# Altium PCB BreakBoard.PcbDoc
Units mm, origin at the board's own origin, x right, y up, seen from the top; angles counter-clockwise.
Board outline 137.03 x 88.14 mm, 2 copper layers (Top Layer, Bottom Layer), stack 1.331 mm thick; 41 components, 30 nets, 130 pads, 0 vias.
Unrouted connection lines stored in the file: 63.
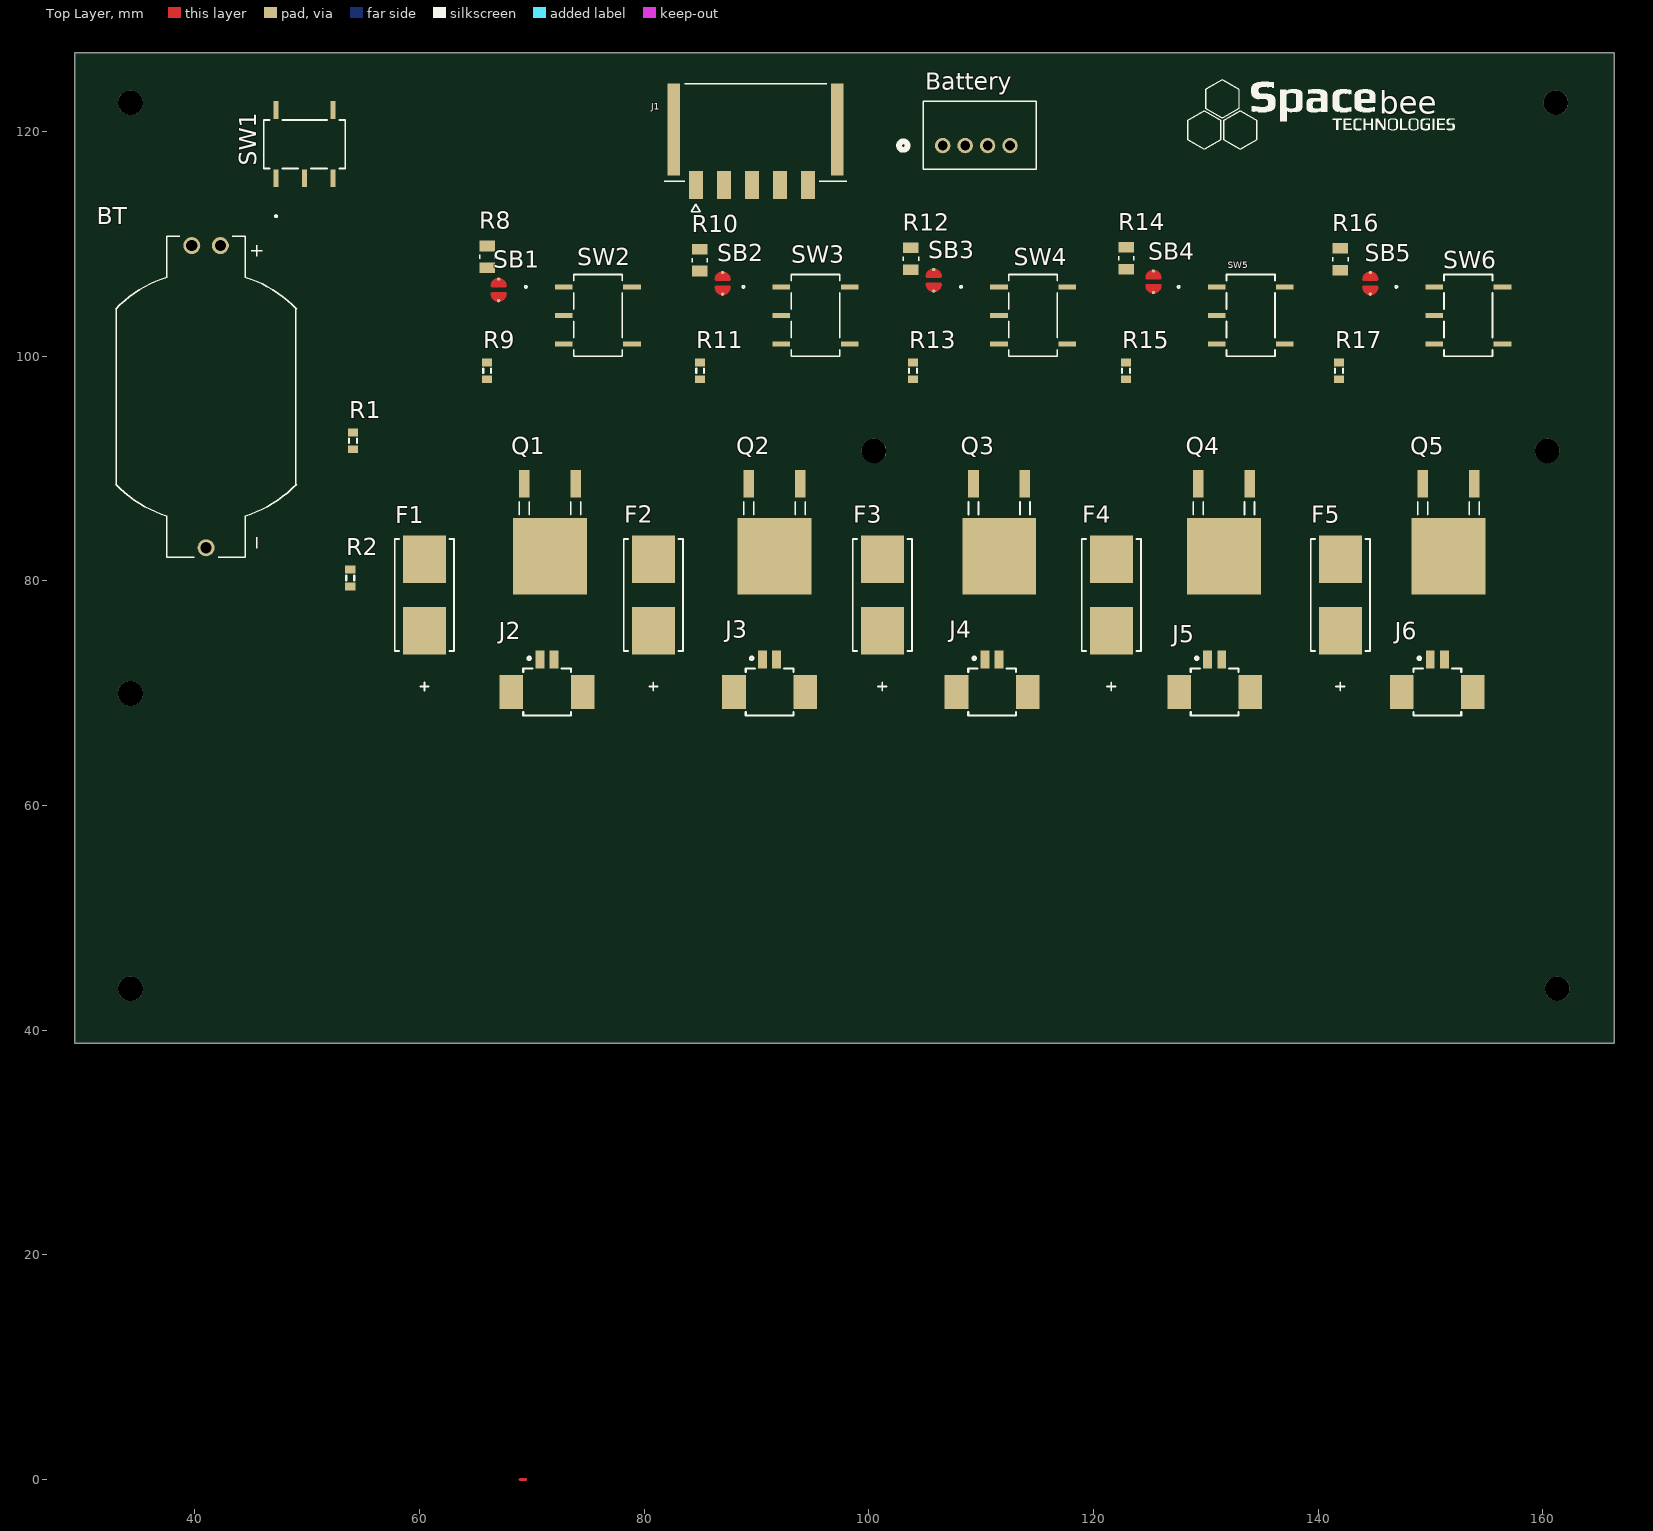
[diagram p0: Top Layer view]
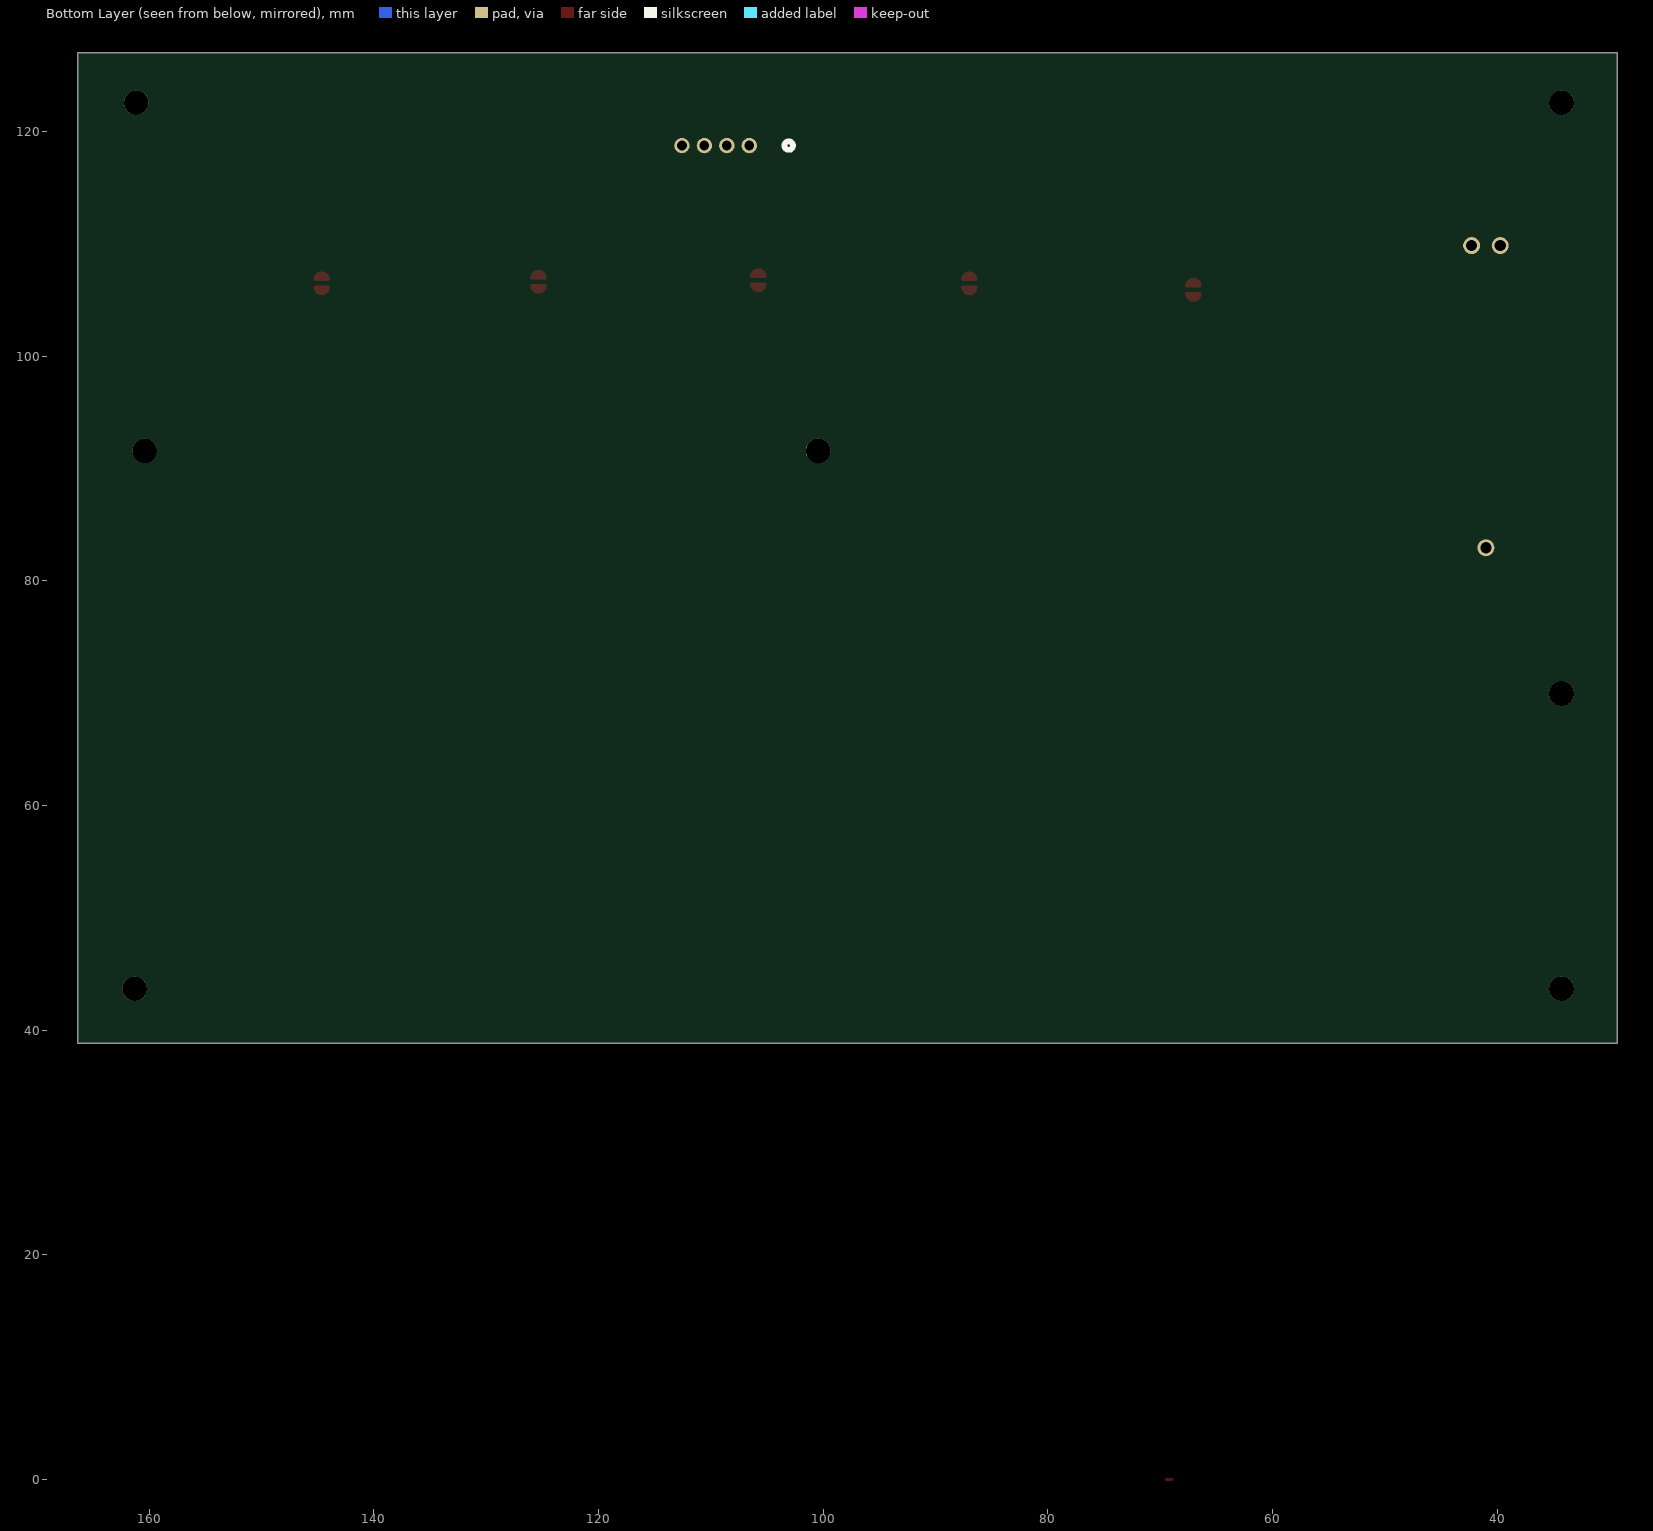
[diagram p1: Bottom Layer view, seen from below]

## Layer stack, top to bottom
Top Solder: solder mask 0.0102, Solder Resist, Dk 3.5
Top Layer: signal copper 0.0356
Dielectric 1: dielectric 1.26, FR-4, Dk 4.8
Bottom Layer: signal copper 0.0356
Bottom Solder: solder mask 0.0102, Solder Resist, Dk 3.5

## Board outline
29.337,38.862 166.37,38.862 166.37,127 29.337,127

## Design rules (kind name [scope] priority, off if disabled: settings)
Clearance Clearance_1 [All] p1: gap=0.4 ignorepadtopadclearanceinfootprint=FALSE
Clearance "Schematic Clearance Constraint" [InNet('GND')] p2: gap=0.015 ignorepadtopadclearanceinfootprint=FALSE
Clearance Vias [OnLayer('Top Layer')] p3: gap=0.8 ignorepadtopadclearanceinfootprint=FALSE
PolygonConnect [All] p1: connectstyle=Relief reliefconductorwidth=0.254 reliefentries=4 polygonreliefangle="90 Angle" airgapwidth=0.254
RoutingVias [All] p1: holewidth=0.711 width=1.27 viastyle="Through Hole" minholewidth=0.711 minwidth=1.27 maxholewidth=0.711 maxwidth=1.27
SolderMaskExpansion [All] p1: expansion=0.102
Width "Schematic Width Constraint_11" [InNet('NetJ3_2')] p1: maxlimit=1.473 minlimit=1.473 preferedwidth=1.473 minimp=50.000000 maximp=50.000000 favimp=50.000000
Width "Schematic Width Constraint_10" [InNet('GND')] p2: maxlimit=1.473 minlimit=1.473 preferedwidth=1.473 minimp=50.000000 maximp=50.000000 favimp=50.000000
Width "Schematic Width Constraint_9" [InNet('NetJ5_2')] p3: maxlimit=1.473 minlimit=1.473 preferedwidth=1.473 minimp=50.000000 maximp=50.000000 favimp=50.000000
Width "Schematic Width Constraint_8" [InNet('NetJ4_2')] p4: maxlimit=1.473 minlimit=1.473 preferedwidth=1.473 minimp=50.000000 maximp=50.000000 favimp=50.000000
Width "Schematic Width Constraint_7" [InNet('NetJ6_2')] p5: maxlimit=1.473 minlimit=1.473 preferedwidth=1.473 minimp=50.000000 maximp=50.000000 favimp=50.000000
Width "Schematic Width Constraint_1" [InNet('NetJ2_2')] p6: maxlimit=1.473 minlimit=1.473 preferedwidth=1.473 minimp=50.000000 maximp=50.000000 favimp=50.000000
Width "Schematic Width Constraint" [InNetClass('Ids')] p7: maxlimit=1.473 minlimit=1.473 preferedwidth=1.473 minimp=50.000000 maximp=50.000000 favimp=50.000000
Width [All] p8: maxlimit=0.254 minlimit=0.254 preferedwidth=0.254
30 further rules are at their usual default settings.

## Classes and differential pairs
net class Ids: NetBattery_4
net class Undefined: GND NetJ2_2 NetJ3_2 NetJ4_2 NetJ5_2 NetJ6_2 NetR1_1

## Components (designator, comment, footprint, x,y, rotation, side; value= is the part's Value field where it differs from the comment)
Battery "Header 4" 292132-4_TYC 106.585,118.745 r0 top
BT "BU2032-1" BAT_BU2032-1 41.021,96.393 r270 top
F1 "015403.5DRT" 0154Series_LTF 60.452,78.74 r90 top
F2 "015403.5DRT" 0154Series_LTF 80.835,78.74 r90 top
F3 "015403.5DRT" 0154Series_LTF 101.219,78.74 r90 top
F4 "015403.5DRT" 0154Series_LTF 121.603,78.74 r90 top
F5 "015403.5DRT" 0154Series_LTF 141.986,78.74 r90 top
J1 "Micro" MOLEX_1054302105 89.916,120.015 r180 top
J2 "DC/DC" MOLEX_53261-0271 71.374,70.104 r0 top
J3 "DC/DC" MOLEX_53261-0271 91.183,70.104 r0 top
J4 "DC/DC" MOLEX_53261-0271 110.993,70.104 r0 top
J5 "DC/DC" MOLEX_53261-0271 130.802,70.104 r0 top
J6 "DC/DC" MOLEX_53261-0271 150.612,70.104 r0 top
Q1 "IRL530" IRL530NSTRLPBF_INF 71.628,82.169 r180 top
Q2 "IRL530" IRL530NSTRLPBF_INF 91.623,82.169 r180 top
Q3 "IRL530" IRL530NSTRLPBF_INF 111.619,82.169 r180 top
Q4 "IRL530" IRL530NSTRLPBF_INF 131.614,82.169 r180 top
Q5 "IRL530" IRL530NSTRLPBF_INF 151.61,82.169 r180 top
R1 "Res3" J1-0603 54.102,92.468 r90 top value=1M
R2 "Res3" J1-0603 53.848,80.252 r90 top value=3.3M
R8 "Res3" RESC2012X60N 66.04,108.839 r90 top value=2.8M
R9 "Res3" J1-0603 66.04,98.691 r90 top value=3.3M
R10 "Res3" RESC2012X60N 84.963,108.547 r90 top value=2.8M
R11 "Res3" J1-0603 84.995,98.691 r90 top value=3.3M
R12 "Res3" RESC2012X60N 103.759,108.674 r90 top value=2.8M
R13 "Res3" J1-0603 103.949,98.691 r90 top value=3.3M
R14 "Res3" RESC2012X60N 122.936,108.712 r90 top value=2.8M
R15 "Res3" J1-0603 122.904,98.691 r90 top value=3.3M
R16 "Res3" RESC2012X60N 141.986,108.623 r90 top value=2.8M
R17 "Res3" J1-0603 141.859,98.691 r90 top value=3.3M
SB1 "SolderBridge" PCBComponent_1#1 62.936,114.473 r270 top
SB2 "SolderBridge" PCBComponent_1#2 82.875,115.052 r270 top
SB3 "SolderBridge" PCBComponent_1#3 101.671,115.321 r270 top
SB4 "SolderBridge" PCBComponent_1#4 121.229,115.194 r270 top
SB5 "SolderBridge" PCBComponent_1#5 140.533,115.052 r270 top
SW1 "GT12MSCBE" SW5_GT12MSCBE_CNK 49.784,118.872 r90 top
SW2 "GT12MSCBE" SW5_GT12MSCBE_CNK 75.895,103.632 r0 top
SW3 "GT12MSCBE" SW5_GT12MSCBE_CNK 95.266,103.632 r0 top
SW4 "GT12MSCBE" SW5_GT12MSCBE_CNK 114.636,103.632 r0 top
SW5 "GT12MSCBE" SW5_GT12MSCBE_CNK 134.007,103.632 r0 top
SW6 "GT12MSCBE" SW5_GT12MSCBE_CNK 153.378,103.632 r0 top

## Footprints (in the part's own frame and the unit in brackets; to place one, negate y for a bottom-side part, rotate by r counter-clockwise, add the part's x,y. Pads: shape width x height; smd on the part's side, far side on the other; paste and mask are expansions set on the pad)
0154Series_LTF [mil]
  rect 167x150 smd paste+0 mask+0: 1(-125.5,0) 2(125.5,0)
  silkscreen extent -336,-104 196,104, body extent -191,-99 191,99, height 152
292132-4_TYC [mil]
  round 54 hole 34 mask+0: 1(0,0) 2(78.74,0) 3(157.48,0) 4(236.22,0)
  silkscreen extent -153,-83 328,155, body extent -65,-85 321,143, height 268
BAT_BU2032-1 [mm]
  round 1.508 hole 1: NEG(13.45,0) S1+(-13.45,1.27) S2+(-13.45,-1.27)
  silkscreen extent -14.3,-8.06 14.3,8.06, body extent -14.43,-10 14.17,10, height 5.3
IRL530NSTRLPBF_INF [mil]
  rect 37x98 smd paste+0 mask+0: 1(-90.16,-254.84) 3(90.16,-254.84)
  rect 259x268 smd paste+0 mask+0: 2(0,0)
  silkscreen extent -108,-192 108,-147, body extent -129,-196 129,120, height 94
J1-0603 [mm] "Chip Resistor, Body 1.6x0.8mm, IPC High Density"
  rect 0.7x0.9 smd: 1(-0.75,0) 2(0.75,0)
  silkscreen extent -0.2,-0.35 0.2,0.35, body extent -0.85,-0.48 0.85,0.48, height 0.9
MOLEX_53261-0271 [mm]
  rect 0.8x1.6 smd: 1(-0.625,2.9) 2(0.625,2.9)
  rect 2.1x3 smd: P1(-3.175,0) P2(3.175,0)
  silkscreen extent -2.13,-2.1 2.13,3.14, body extent -3.82,-2.12 3.83,3.08, height 3.23
MOLEX_1054302105 [mm]
  rect 1.24x2.5 smd mask+0: 1(5.3,4.775) 2(2.8,4.775) 3(0.3,4.775) 4(-2.2,4.775) 5(-4.7,4.775)
  rect 1.1x8.2 smd mask+0: S1(-7.27,-0.155) S2(7.27,-0.155)
  silkscreen extent -8.12,-4.26 8.12,7.17, body extent -8.12,-5.8 8.12,5.63, height 6.99
PCBComponent_1#1 [mm]
  round 0.3 smd: 0(9.53,4.12) 1(7.61,4.12)
  Top Layer lines w0.254: 8.96,4.39 9.23,4.39 ; 8.9,3.52 ccw(c8.9,4.12) 9.5,4.12 ccw(c8.9,4.12) 8.9,4.72 ; 8.9,3.52 8.9,3.52 ; 8.9,3.52 8.9,3.52 ; 8.9,3.52 8.9,3.89 ; 8.9,3.52 8.9,3.52 ; 8.9,3.89 9.1,3.69 9.32,3.91 ; 8.9,3.89 8.9,4.33 ; 8.9,3.89 8.9,4.33 ; 9.32,3.91 9.32,4.12 9.32,4.32 9.23,4.23 9.23,4.39 ; 9.32,3.91 8.92,3.91 9.02,4.01 9.02,4.18 9.035,4.195 ; 9.32,3.91 9.11,4.12 9.035,4.195 ; 9.035,4.195 8.9,4.33 ; 9.035,4.195 9.23,4.39 ; 8.9,4.33 8.9,4.72 ; 8.9,4.33 8.9,4.72 ; 8.9,4.33 8.9,4.72 ; 9.23,4.39 8.9,4.72 ; 8.9,4.72 8.9,4.72 ; 8.9,4.72 8.9,4.72 ; 8.9,4.72 8.9,4.72 ; 8.9,4.72 8.9,4.72 ; 8.23,3.52 cw(c8.23,4.12) 8.23,4.72 8.23,3.52 ; 8.06,3.69 7.83,3.92 7.83,4.12 7.83,4.36 8.06,4.59 8.06,3.69
PCBComponent_1#2 [mm]
  round 0.3 smd: 0(9.53,4.12) 1(7.61,4.12)
  Top Layer lines w0.254: 8.96,4.39 9.23,4.39 ; 8.9,3.52 ccw(c8.9,4.12) 9.329,3.701 ccw(c8.9,4.12) 9.5,4.1 ccw(c8.9,4.12) 8.9,4.72 ; 8.9,3.52 8.9,3.89 ; 8.9,3.52 8.9,3.52 ; 8.9,3.52 8.9,3.52 ; 8.9,3.52 8.9,3.52 ; 8.9,3.89 9.089,3.701 9.1,3.69 9.111,3.701 9.32,3.91 ; 8.9,3.89 8.9,4.33 ; 8.9,3.89 8.9,4.33 ; 9.32,3.91 8.92,3.91 9.02,4.01 9.02,4.18 9.035,4.195 ; 9.32,3.91 9.13,4.1 9.035,4.195 ; 9.32,3.91 9.32,4.1 9.32,4.12 9.32,4.32 9.23,4.23 9.23,4.39 ; 9.035,4.195 8.9,4.33 ; 9.035,4.195 9.23,4.39 ; 8.9,4.33 8.9,4.72 ; 8.9,4.33 8.9,4.72 ; 8.9,4.33 8.9,4.72 ; 9.23,4.39 8.9,4.72 ; 8.9,4.72 8.9,4.72 ; 8.9,4.72 8.9,4.72 ; 8.9,4.72 8.9,4.72 ; 8.9,4.72 8.9,4.72 ; 8.23,3.52 cw(c8.23,4.12) 8.23,4.72 8.23,3.52 ; 8.06,3.69 7.83,3.92 7.83,4.12 7.83,4.36 8.06,4.59 8.06,3.69
PCBComponent_1#3 [mm]
  round 0.3 smd: 0(9.53,4.12) 1(7.61,4.12)
  Top Layer lines w0.254: 8.96,4.39 9.23,4.39 ; 8.9,3.89 8.9,3.52 ccw(c8.9,4.12) 9.5,4.12 ccw(c8.9,4.12) 8.9,4.72 ; 8.9,3.89 9.1,3.69 9.32,3.91 ; 8.9,3.89 8.9,4.33 ; 8.9,3.89 8.9,4.33 ; 9.32,3.91 9.32,4.12 9.32,4.32 9.23,4.23 9.23,4.39 ; 9.32,3.91 8.92,3.91 9.02,4.01 9.02,4.18 9.035,4.195 ; 9.32,3.91 9.035,4.195 ; 9.035,4.195 8.9,4.33 ; 9.035,4.195 9.23,4.39 ; 8.9,4.33 8.9,4.72 ; 8.9,4.33 8.9,4.72 ; 8.9,4.33 8.9,4.72 ; 9.23,4.39 8.9,4.72 ; 8.23,3.52 cw(c8.23,4.12) 7.83,3.673 cw(c8.23,4.12) 8.23,4.72 8.23,3.52 ; 8.06,3.69 7.83,3.92 7.83,4.12 7.83,4.36 8.06,4.59 8.06,3.69
PCBComponent_1#4 [mm]
  round 0.3 smd: 0(9.53,4.12) 1(7.61,4.12)
  Top Layer lines w0.254: 8.96,4.39 9.23,4.39 ; 8.9,3.89 8.9,3.52 ccw(c8.9,4.12) 9.486,3.993 ccw(c8.9,4.12) 8.9,4.72 ; 8.9,3.89 9.1,3.69 9.32,3.91 ; 8.9,3.89 8.9,4.33 ; 8.9,3.89 8.9,4.33 ; 9.32,3.91 8.92,3.91 9.02,4.01 9.02,4.18 9.035,4.195 ; 9.32,3.91 9.237,3.993 9.035,4.195 ; 9.32,3.91 9.32,3.993 9.32,4.12 9.32,4.32 9.23,4.23 9.23,4.39 ; 9.035,4.195 8.9,4.33 ; 9.035,4.195 9.23,4.39 ; 8.9,4.33 8.9,4.72 ; 8.9,4.33 8.9,4.72 ; 8.9,4.33 8.9,4.72 ; 9.23,4.39 8.9,4.72 ; 8.23,3.52 cw(c8.23,4.12) 8.23,4.72 8.23,3.52 ; 8.06,3.69 7.83,3.92 7.83,4.12 7.83,4.36 8.06,4.59 8.06,3.69
PCBComponent_1#5 [mm]
  round 0.3 smd: 0(9.53,4.12) 1(7.61,4.12)
  Top Layer lines w0.254: 8.96,4.39 9.23,4.39 ; 8.9,3.52 ccw(c8.9,4.12) 9.5,4.12 ccw(c8.9,4.12) 8.9,4.72 ; 8.9,3.52 8.9,3.52 ; 8.9,3.52 8.9,3.52 ; 8.9,3.52 8.9,3.89 ; 8.9,3.52 8.9,3.52 ; 8.9,3.89 9.1,3.69 9.32,3.91 ; 8.9,3.89 8.9,4.33 ; 8.9,3.89 8.9,4.33 ; 9.32,3.91 9.32,4.12 9.32,4.32 9.23,4.23 9.23,4.39 ; 9.32,3.91 8.92,3.91 9.02,4.01 9.02,4.12 9.02,4.18 9.035,4.195 ; 9.32,3.91 9.11,4.12 9.035,4.195 ; 9.035,4.195 8.9,4.33 ; 9.035,4.195 9.23,4.39 ; 8.9,4.33 8.9,4.72 ; 8.9,4.33 8.9,4.72 ; 8.9,4.33 8.9,4.72 ; 9.23,4.39 8.9,4.72 ; 8.9,4.72 8.9,4.72 ; 8.9,4.72 8.9,4.72 ; 8.9,4.72 8.9,4.72 ; 8.9,4.72 8.9,4.72 ; 8.23,3.52 cw(c8.23,4.12) 7.668,3.909 cw(c8.23,4.12) 8.23,4.72 8.23,3.52 ; 8.06,3.69 7.83,3.92 7.83,4.071 7.83,4.12 7.83,4.36 8.06,4.59 8.06,3.69
RESC2012X60N [mm]
  rect 0.96x1.38 smd: 1(-0.978,0) 2(0.978,0)
  silkscreen extent -0.18,-0.68 0.18,0.68, body extent -1.02,-0.83 1.02,0.83, height 0.51
SW5_GT12MSCBE_CNK [mil]
  rect 62x18 smd paste+0 mask+0: 1(-119.5,100) 2(-119.5,0) 3(-119.5,-100) 4(119.5,-100) 6(119.5,100)
  silkscreen extent -256,-143 85,143, body extent -139,-138 139,138, height 443

## Part data
Battery: "Header, 4-Pin", LatestRevisionDate=17-Jul-2002, LatestRevisionNote="Re-released for DXP Platform.", Publisher="Altium Limited"
BT: "HOLDER CR2032 W/ PC PINS", Package="Non-Standard MPD", DigiKey-Purchase-URL=https://snapeda.com/shop?store=DigiKey&id=4219651, MF=MPD, MP=BU2032-1, SnapEDA_Link=https://www.snapeda.com/parts/BU2032-1/Memory%20Protection%20Devices/view-part/4219651/?ref=snap
F1 F2 F3 F4 F5: "No Description Available", Mfr_Name="Littelfuse Inc", Copyright="Copyright (C) 2022 Ultra Librarian. All rights reserved.", Manufacturer_Part_Number=015403.5DRT, RefDes=RefDes, Type=DEV
J1: library part HTSW-105-07-L-S, "No Description Available", Mfr_Name="Samtec Inc", Copyright="Copyright (C) 2022 Ultra Librarian. All rights reserved.", Digi-Key_Part_Number_1=SAM11370-ND, Manufacturer_Part_Number=HTSW-105-07-L-S, RefDes=RefDes, Type=DEV
J2 J3 J4 J5 J6: library part TSW-102-05-T-S, "No Description Available", Mfr_Name="Samtec Inc", Copyright="Copyright (C) 2022 Ultra Librarian. All rights reserved.", Digi-Key_Part_Number_1=SAM1019-02-ND, Digi-Key_Part_Number_2=TSW-102-05-T-S-NDL, Digi-Key_Part_Number_3=612-TSW-102-05-T-S-ND, Manufacturer_Part_Number=TSW-102-05-T-S, RefDes=RefDes, Type=DEV
Q1 Q2 Q3 Q4 Q5: "N-Channel 100V 15A (Tc) 88W (Tc) Through Hole TO-220AB", Package="TO-220-3 Vishay / Siliconix", Availability=Unavailable, MF="Vishay / Siliconix", MP=IRL530, Price=None, SnapEDA_Link=https://www.snapeda.com/parts/IRL530/Vishay%20Siliconix/view-part/4705327/?ref=snap
R1 R2 R8 R9 R10 R11 R12 R13 R14 R15 R16 R17: "Resistor", LatestRevisionDate=29-May-2009, LatestRevisionNote="IPC-7351 Footprint Added.", PackageDescription="Chip Resistor", PackageReference=J1-0603, Published=8-Jun-2000, Publisher="Altium Limited"
SB1 SB2 SB3 SB4 SB5: library part Component_1
SW1 SW2 SW3 SW4 SW5 SW6: "No Description Available", Mfr_Name=C&K, Copyright="Copyright (C) 2022 Ultra Librarian. All rights reserved.", Digi-Key_Part_Number_1=CKN9050TR-ND, Digi-Key_Part_Number_2=CKN9050CT-ND, Digi-Key_Part_Number_3=CKN9050DKR-ND, Digi-Key_Part_Number_4=CKN9050TR-NDL, Manufacturer_Part_Number=GT12MSCBE, RefDes=RefDes, Type=DEV

## Free pads (board coordinates)
  round 2.2 hole 2.2 unplated: H1(34.29,122.555) H2(34.29,69.977) H3(100.457,91.567) H4(34.29,43.688) H5(161.163,122.555) H6(160.401,91.567) H7(161.29,43.688)

## Nets (pads, with @x,y where several pads share a name; then routed paths per layer and width w, separated by ;. In a path a pad name is that pad's centre, name@x,y a point inside that pad or via, vN(x,y) a via of type N, cw(c..) or ccw(c..) an arc to the next point about the centre after c; other vN are vias at no path point)
GND: Battery.1 Battery.2 Battery.3 BT.NEG Q1.3 Q2.3 Q3.3 Q4.3 Q5.3 R2.1 R9.1 R11.1 R13.1 R15.1 R17.1
NetBattery_4: Battery.4 F1.2 F2.2 F3.2 F4.2 F5.2
NetBT_S1+: BT.S1+ BT.S2+ SW1.1
NetF1_1: F1.1 J2.1
NetF2_1: F2.1 J3.1
NetF3_1: F3.1 J4.1
NetF4_1: F4.1 J5.1
NetF5_1: F5.1 J6.1
NetJ1_1: J1.1 R8.2
NetJ1_2: J1.2 R10.2
NetJ1_3: J1.3 R12.2
NetJ1_4: J1.4 R14.2
NetJ1_5: J1.5 R16.2
NetJ2_2: J2.2 Q1.2
NetJ3_2: J3.2 Q2.2
NetJ4_2: J4.2 Q3.2
NetJ5_2: J5.2 Q4.2
NetJ6_2: J6.2 Q5.2
NetQ1_1: Q1.1 SB1.0 SW2.3
NetQ2_1: Q2.1 SB2.0 SW3.3
NetQ3_1: Q3.1 SB3.0 SW4.3
NetQ4_1: Q4.1 SB4.0 SW5.3
NetQ5_1: Q5.1 SB5.0 SW6.3
NetR1_1: R1.1 R2.2 SW2.1 SW3.1 SW4.1 SW5.1 SW6.1
NetR1_2: R1.2 SW1.3
NetR8_1: R8.1 R9.2 SB1.1
NetR10_1: R10.1 R11.2 SB2.1
NetR12_1: R12.1 R13.2 SB3.1
NetR14_1: R14.1 R15.2 SB4.1
NetR16_1: R16.1 R17.2 SB5.1
pads on no net: J1.S1 J1.S2 J2.P1 J2.P2 J3.P1 J3.P2 J4.P1 J4.P2 J5.P1 J5.P2 J6.P1 J6.P2 SW1.2 SW1.4 SW1.6 SW2.2 SW2.4 SW2.6 SW3.2 SW3.4 SW3.6 SW4.2 SW4.4 SW4.6 SW5.2 SW5.4 SW5.6 SW6.2 SW6.4 SW6.6
copper on no net: | length 0.5
  Top Layer w0.254: 68.961,0 69.469,0

## Other copper
Top Layer:
  pour cut-out: 29.464,64.929 166.497,64.929 166.497,38.957 29.464,38.957
Bottom Layer:
  pour cut-out: 29.591,64.707 166.624,64.706 166.624,38.735 29.591,38.735

## Silkscreen, mask and mechanical layers (free items; w line width, h text height)
Top Overlay:
  drawing of 20 lines, arcs and shapes, not listed
  text "bee" at 145.428,121.592 h2

## Text inside footprints (layer, text, board x,y; h text height)
J1: Mechanical 13 "PCB Edge" at 86.036,132.74 h0.75 r180; Mechanical 13 "MAX" at 99.786,129.74 h0.75 r180
Q1: Mechanical 13 "*" at 74.236,85.598 h1.27 r180
Q2: Mechanical 13 "*" at 94.231,85.598 h1.27 r180
Q3: Mechanical 13 "*" at 114.226,85.598 h1.27 r180
Q4: Mechanical 13 "*" at 134.222,85.598 h1.27 r180
Q5: Mechanical 13 "*" at 154.217,85.598 h1.27 r180